# EAGLE board lada_dash_v2.2 (EAGLE 7.2.0)
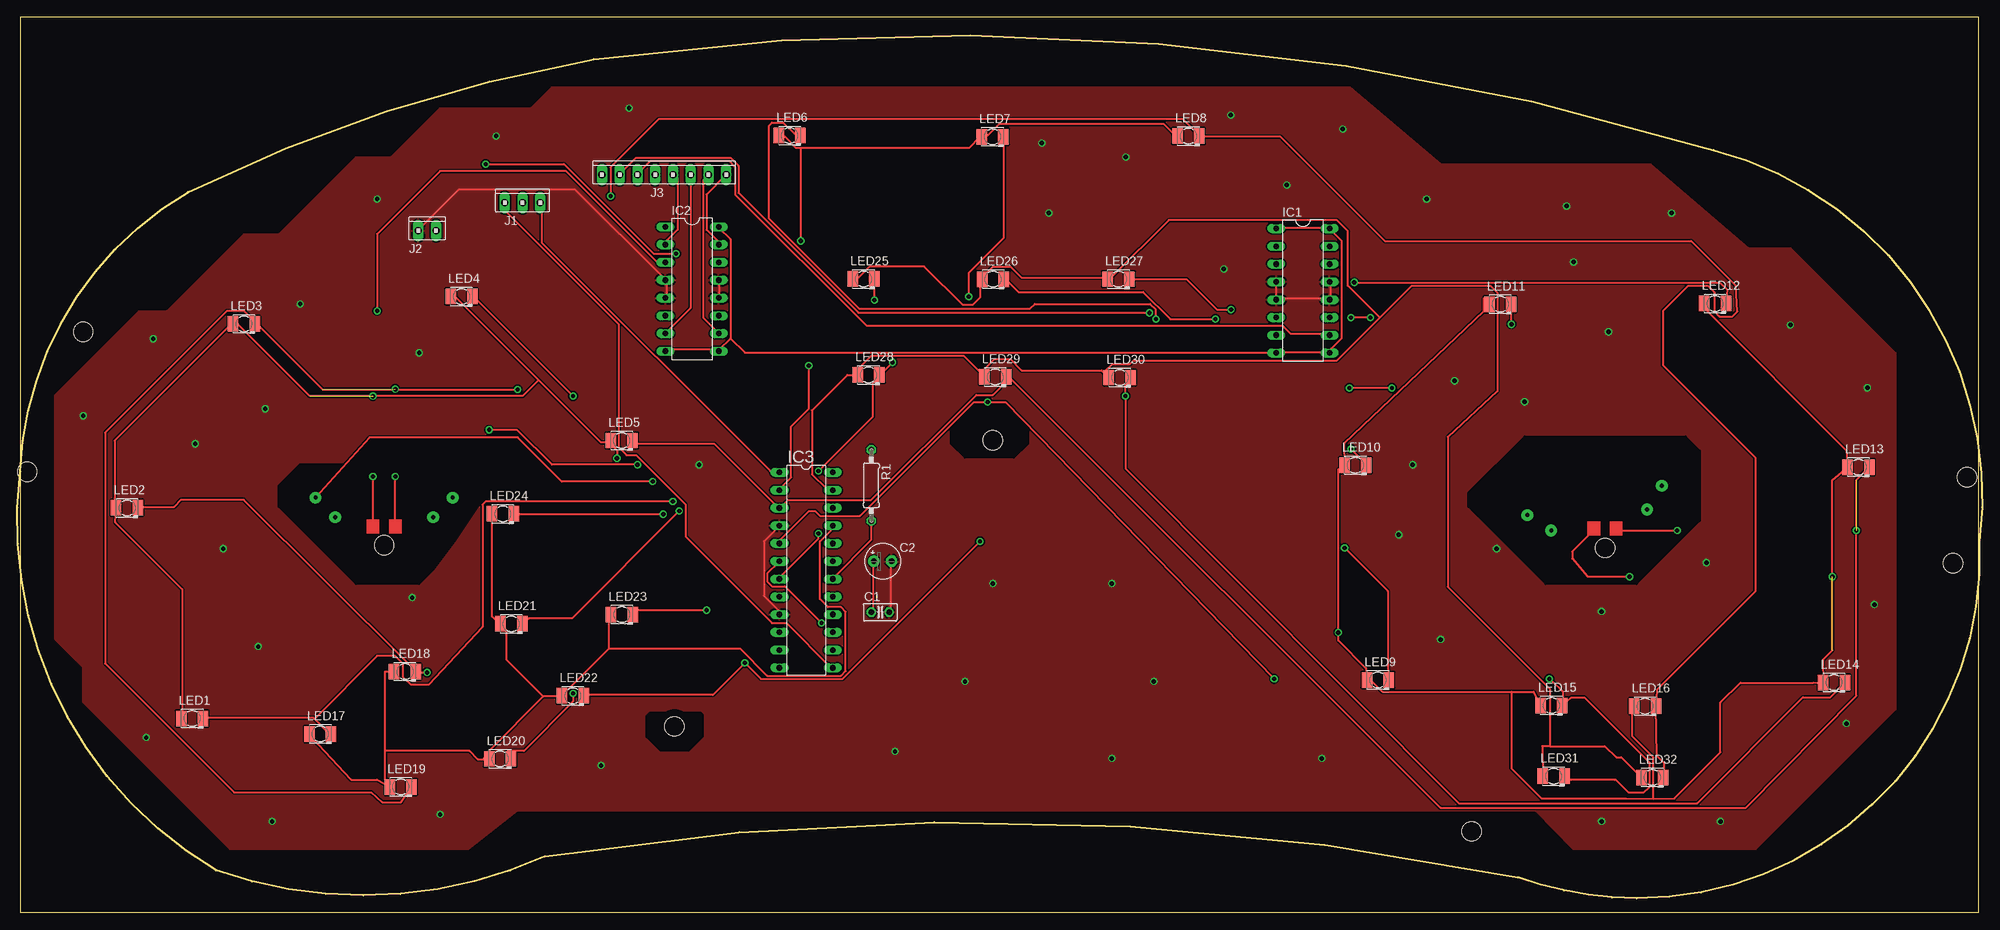
[diagram p0: board, top side]
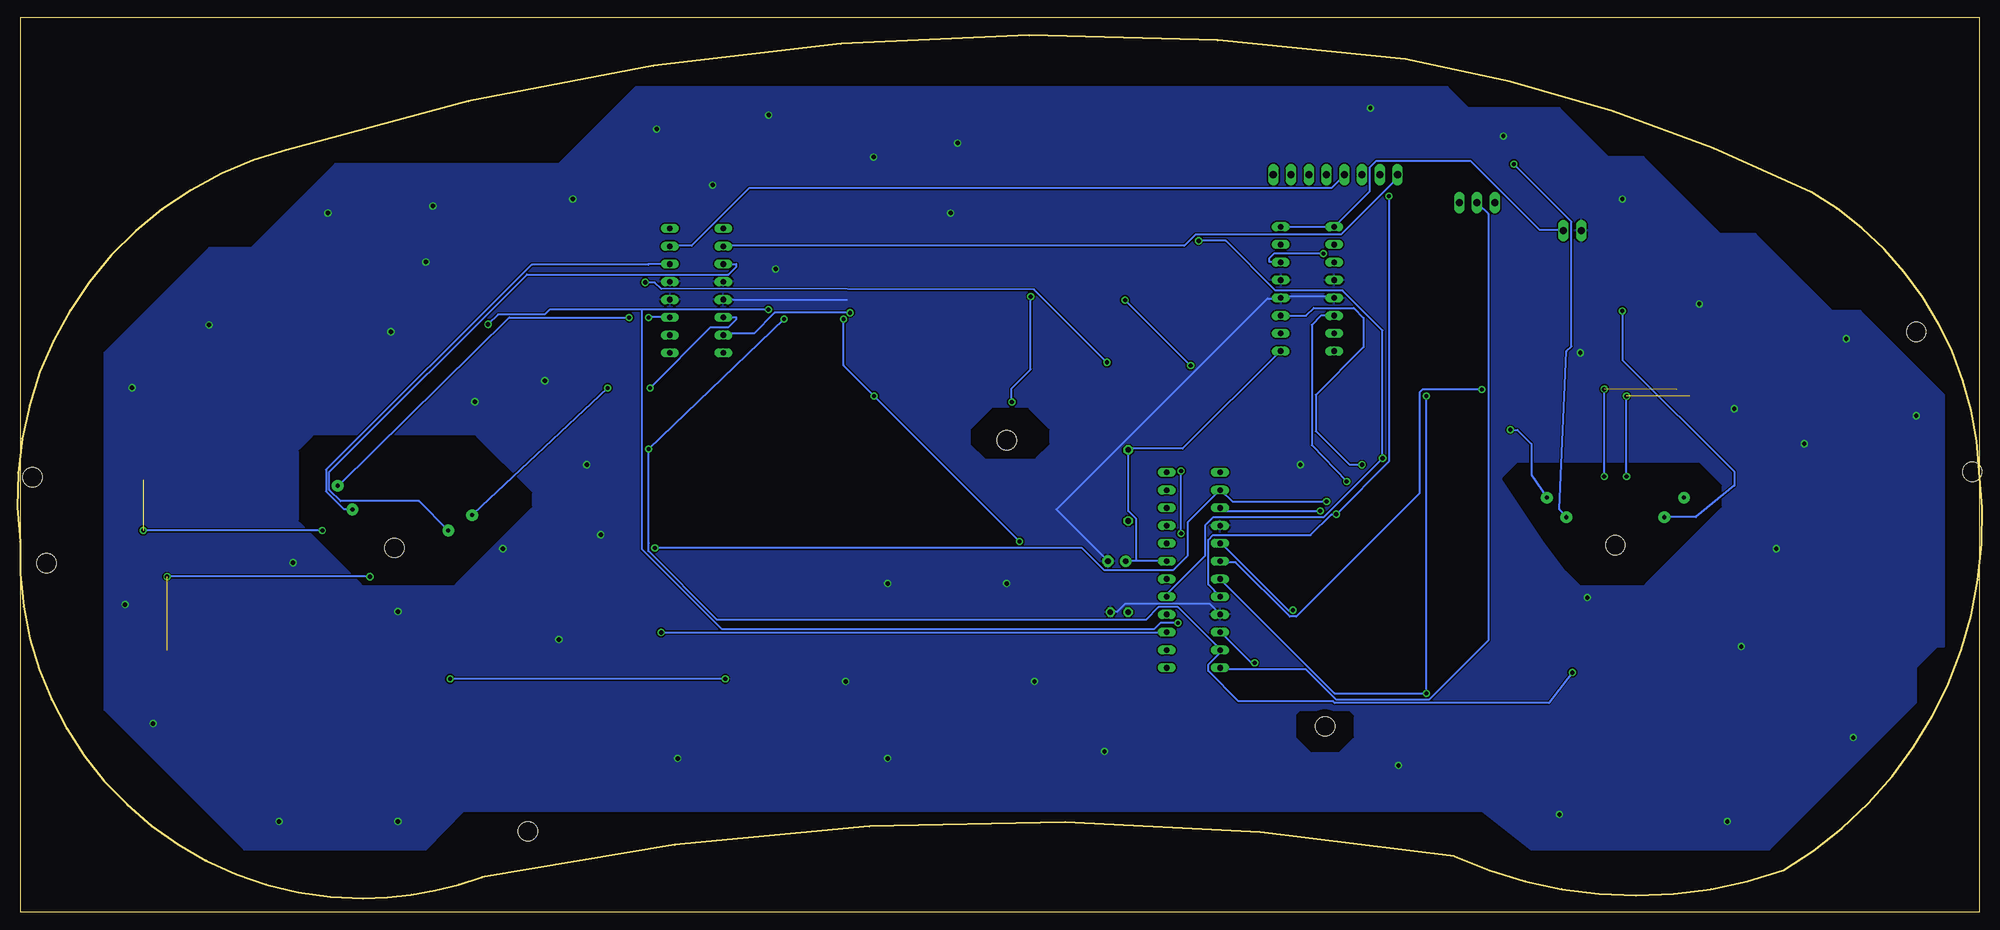
[diagram p1: board, bottom side, seen from below]

Size 280.76 x 127.94 mm. Coordinates in mm from the lower left corner, seen from the top.
Outline: 0.4,63 0.4,127.94 280.32,127.94 280.32,0 0.4,0 0.4,63
Outline: 0.4,63 arc-57 24.4,103 arc-16 82.4,122 arc-25 242.4,109 arc-82 280.4,53 arc-92 231.4,2 arc-18 214.4,5 arc21 75.4,8 arc-43 28.4,6 arc-66 0.4,63
Copper layers (1*16): Top 0.035mm / dielectric 1.5mm / Bottom 0.035mm
Design rules "default *": minimum track width 10mil, minimum drill 23mil, track to track 8mil, track to pad 8mil, pad to pad 8mil, via to via 8mil, smd to smd 0mil, copper to edge 40mil, drill to drill 6mil, minimum pad ring 10mil, minimum via ring 8mil, stop-mask expansion 4mil, vias tented up to drill 4mil, thermal gap 10mil
Holes 2.8 mm at 1.4,63 9.4,83 93.9,26.6 139.4,67.5 207.8,11.6 278.6,62.2 276.6,49.9 52.4,52.5 226.9,52.1

## Footprints (pad centres in the part's own frame; a part is rotated, then mirrored left to right if it is on the bottom)
C025-025X050 = drill 0.813 octagon: 1 -1.27,0; 2 1.27,0
E2,5-5 = drill 0.813 pad 1.6: + -1.27,0 | drill 0.813 pad 1.6 octagon: - 1.27,0
DIL16 = drill 0.813 long: 1 -8.89,-3.81; 2 -6.35,-3.81; 3 -3.81,-3.81; 4 -1.27,-3.81; 5 1.27,-3.81; 6 3.81,-3.81; 7 6.35,-3.81; 8 8.89,-3.81; 9 8.89,3.81; 10 6.35,3.81; 11 3.81,3.81; 12 1.27,3.81; 13 -1.27,3.81; 14 -3.81,3.81; 15 -6.35,3.81; 16 -8.89,3.81
DIL24-3 = drill 0.813 long: 1 -13.97,-3.81; 2 -11.43,-3.81; 3 -8.89,-3.81; 4 -6.35,-3.81; 5 -3.81,-3.81; 6 -1.27,-3.81; 7 1.27,-3.81; 8 3.81,-3.81; 9 6.35,-3.81; 10 8.89,-3.81; 11 11.43,-3.81; 12 13.97,-3.81; 13 13.97,3.81; 14 11.43,3.81; 15 8.89,3.81; 16 6.35,3.81; 17 3.81,3.81; 18 1.27,3.81; 19 -1.27,3.81; 20 -3.81,3.81; 21 -6.35,3.81; 22 -8.89,3.81; 23 -11.43,3.81; 24 -13.97,3.81
10X03MTA = drill 1.016 long: 1 2.54,0; 2 0,0; 3 -2.54,0
10X02MTA = drill 1.016 long: 1 1.27,0; 2 -1.27,0
10X08MTA = drill 1.016 long: 1 8.89,0; 2 6.35,0; 3 3.81,0; 4 1.27,0; 5 -1.27,0; 6 -3.81,0; 7 -6.35,0; 8 -8.89,0
KA-3528ASYC = smd 1.5 x 2.2: A -1.55,0; C 1.55,0
0207/10 = drill 0.813 octagon: 1 -5.08,0; 2 5.08,0

## Placement (x,y rotation side)
C1  [C025-025X050]  123.31,42.93 0 top
C2  [E2,5-5]  123.66,50.2 0 top
IC1  L293D  [DIL16]  183.71,88.88 270 top
IC2  L293D  [DIL16]  96.41,89.13 270 top
IC3  MAX7219CNG  [DIL24-3]  112.71,48.94 270 top
J1  [10X03MTA]  72.17,101.47 0 top
J2  [10X02MTA]  58.55,97.47 0 top
J3  [10X08MTA]  92.41,105.47 0 top
LED1  LY_T679-D2E2-1  [KA-3528ASYC]  24.96,27.72 0 top
LED2  LY_T679-D2E2-1  [KA-3528ASYC]  15.66,57.83 0 top
LED3  LY_T679-D2E2-1  [KA-3528ASYC]  32.36,84.14 0 top
LED4  LY_T679-D2E2-1  [KA-3528ASYC]  63.46,88.05 0 top
LED5  LY_T679-D2E2-1  [KA-3528ASYC]  86.36,67.46 0 top
LED6  LY_T679-D2E2-1  [KA-3528ASYC]  110.36,111.07 0 top
LED7  LY_T679-D2E2-1  [KA-3528ASYC]  139.36,110.88 0 top
LED8  LY_T679-D2E2-1  [KA-3528ASYC]  167.36,110.99 0 top
LED9  LY_T679-D2E2-1  [KA-3528ASYC]  194.42,33.22 0 top
LED10  LY_T679-D2E2-1  [KA-3528ASYC]  191.22,63.93 0 top
LED11  LY_T679-D2E2-1  [KA-3528ASYC]  211.92,86.94 0 top
LED12  LY_T679-D2E2-1  [KA-3528ASYC]  242.62,87.05 0 top
LED13  LY_T679-D2E2-1  [KA-3528ASYC]  263.12,63.66 0 top
LED14  LY_T679-D2E2-1  [KA-3528ASYC]  259.62,32.87 0 top
LED15  LY_T679-D2E2-1  [KA-3528ASYC]  219.22,29.58 0 top
LED16  LY_T679-D2E2-1  [KA-3528ASYC]  232.62,29.49 0 top
LED17  LY_T679-D2E2-1  [KA-3528ASYC]  43.28,25.52 0 top
LED18  LY_T679-D2E2-1  [KA-3528ASYC]  55.38,34.43 0 top
LED19  LY_T679-D2E2-1  [KA-3528ASYC]  54.78,17.94 0 top
LED20  LY_T679-D2E2-1  [KA-3528ASYC]  68.98,21.95 0 top
LED21  LY_T679-D2E2-1  [KA-3528ASYC]  70.58,41.26 0 top
LED22  LY_T679-D2E2-1  [KA-3528ASYC]  79.38,30.97 0 top
LED23  LY_T679-D2E2-1  [KA-3528ASYC]  86.38,42.58 0 top
LED24  LY_T679-D2E2-1  [KA-3528ASYC]  69.38,56.99 0 top
LED25  LY_T679-D2E2-1  [KA-3528ASYC]  120.92,90.56 0 top
LED26  LY_T679-D2E2-1  [KA-3528ASYC]  139.44,90.53 0 top
LED27  LY_T679-D2E2-1  [KA-3528ASYC]  157.34,90.54 0 top
LED28  LY_T679-D2E2-1  [KA-3528ASYC]  121.64,76.85 0 top
LED29  LY_T679-D2E2-1  [KA-3528ASYC]  139.74,76.56 0 top
LED30  LY_T679-D2E2-1  [KA-3528ASYC]  157.54,76.47 0 top
LED31  LY_T679-D2E2-1  [KA-3528ASYC]  219.54,19.48 0 top
LED32  LY_T679-D2E2-1  [KA-3528ASYC]  233.64,19.29 0 top
R1  11K  [0207/10]  122.03,61.05 270 top

## Library data of the parts
C1 R1 = resistor
C2 = rcl
IC1 IC2 = st-microelectronics; MPN: L293D; OC_FARNELL: 9589619; OC_NEWARK: 56P8249
IC3 = maxim; MF: MAXIM; MPN: MAX7219CNG; OC_FARNELL: 1523914; OC_NEWARK: 34C4018
J1-J3 = con-amp
LED1-LED32 = led; COLOR: yellow

## Nets
+5V: C1.1 C2.+ IC1.1 IC1.8 IC1.9 IC1.16 IC2.1 IC2.8 IC2.9 IC2.16 IC3.19 J2.1 R1.1
GND: C1.2 C2.- IC1.4 IC1.5 IC1.12 IC1.13 IC2.4 IC2.5 IC2.12 IC2.13 IC3.4 IC3.9 J2.2
N$1: IC3.17 LED1.A LED2.A LED3.A LED4.A LED5.A LED6.A LED7.A LED8.A
N$2: IC3.15 LED9.A LED10.A LED11.A LED12.A LED13.A LED14.A LED15.A LED16.A
N$3: IC3.21 LED17.A LED18.A LED19.A LED20.A LED21.A LED22.A LED23.A LED24.A
N$4: IC3.23 LED25.A LED26.A LED27.A LED28.A LED29.A LED30.A LED31.A LED32.A
N$5: IC3.2 LED1.C LED9.C LED17.C LED25.C
N$6: IC3.11 LED2.C LED10.C LED18.C LED26.C
N$7: IC3.6 LED3.C LED11.C LED19.C LED27.C
N$8: IC3.7 LED4.C LED12.C LED20.C LED28.C
N$9: IC3.3 LED5.C LED13.C LED21.C LED29.C
N$10: IC3.10 LED6.C LED14.C LED22.C LED30.C
N$11: IC3.5 LED7.C LED15.C LED23.C LED31.C
N$12: IC3.8 LED8.C LED16.C LED24.C LED32.C
N$13: IC3.13 J1.3
N$14: IC3.12 J1.2
N$17: IC3.1 J1.1
N$24: IC1.2 J3.8
N$25: IC1.7 J3.7
N$26: IC1.10 J3.6
N$27: IC1.15 J3.5
N$28: IC2.2 J3.4
N$29: IC2.7 J3.3
N$30: IC2.10 J3.2
N$31: IC2.15 J3.1
N$35: IC3.18 R1.2

## Tracks (layer width: path | path; a pad name or v marks a point on that pad's centre or on a via)
+5V
  Top 0.254: C1.1 122.24,42.98 122.24,50.06 C2.+ | IC1.1 180.08,97.84 187.39,97.84 IC1.16 187.62,97.61 189.22,96.01 189.22,82.07 187.62,80.47 187.62,80.01 IC1.9 187.39,80.01 180.08,80.01 IC1.8 179.85,80.01 103.95,80.01 101.89,82.07 | IC2.8 92.75,80.47 100.07,80.47 IC2.9 100.29,80.47 101.89,82.07 | 101.89,82.07 101.89,96.24 100.29,97.84 IC2.16
  Bottom 0.254: 120.87,50.29 122.24,50.29 C2.+ | 120.87,50.29 116.53,50.29 IC3.19 | 120.87,50.29 120.87,56.24 122.01,57.38 122.01,66.06 R1.1 122.01,66.29 114.24,66.29 100.29,80.24 IC2.9 | IC2.16 100.07,98.07 92.75,98.07 IC2.1 92.52,98.07 87.49,103.1 87.49,106.53 86.58,107.44 73.09,107.44 63.26,97.61 59.83,97.61 J2.1
GND  (via drill 0.6)
  Top 0.254: IC2.12 100.29,88.01 100.29,90.3 IC2.13 | IC2.5 92.75,88.01 92.75,90.3 IC2.4 92.52,90.53 79.72,103.33 63.03,103.33 57.32,97.61 J2.2 | IC1.4 179.85,90.07 179.85,87.78 IC1.5 180.08,87.78 187.39,87.78 IC1.12 187.62,87.78 187.62,90.07 IC1.13 | C1.2 124.75,42.98 124.75,50.06 C2.- | IC3.9 108.75,42.75 108.75,43.2 106.7,45.26 106.7,53.03 108.75,55.09 IC3.4
  Bottom 0.254: IC2.5 92.75,88.01 100.07,88.01 IC2.12 100.29,87.78 102.12,87.78 132.3,57.61 124.98,50.29 C2.- | C1.2 124.53,42.98 123.61,42.98 122.47,44.12 110.35,44.12 108.98,42.75 IC3.9 | 162.25,87.55 179.85,87.55 IC1.5
  other vias: 87.4,115 68.4,111 51.4,102 40.4,87 57.4,80 19.4,82 139.4,47 156.4,47 162.4,33 135.4,33 125.4,23 156.4,22 83.4,21 60.4,14 36.4,13 18.4,25 9.4,71 173.4,114 189.4,112 201.4,102 221.4,101 236.4,100 253.4,84 264.4,75 265.4,44 261.4,27 243.4,13 226.4,13 186.4,22 97.4,64 172.4,92 226.4,43 241.4,50 211.4,52 215.4,73 227.4,83 25.4,67 35.4,72 29.4,52 34.4,38 56.4,45 203.4,39 197.4,54 199.4,64 205.4,76 146.4,110 147.4,100 158.4,108 181.4,104 222.4,93
  pour Top: 5.4,39 5.4,74 17.4,86 21.4,86 32.4,97 37.4,97 48.4,108 53.4,108 60.4,115 73.4,115 76.4,118 190.4,118 203.4,107 233.4,107 247.4,95 253.4,95 268.4,80 268.4,29 248.4,9 222.4,9 217,14.5 71.4,14.5 64.4,9 30.4,9 9.4,30 9.4,35
  pour Bottom: 5.4,38 5.4,74 17.4,86 21.4,86 32.4,97 37.4,97 48.4,108 53.4,108 60.4,115 73.4,115 76.4,118 192.4,118 203.4,107 235.4,107 247.4,95 253.4,95 268.4,80 268.4,29 248.4,9 222.4,9 217,14.5 71.4,14.5 64.4,9 30.4,9 9.4,30 9.4,35 6.4,38
N$1  (via drill 0.6, 0.61)  (1 unrouted)
  Top 0.254: LED1.A 23.57,29.03 23.57,46.19 13.98,55.78 LED2.A 13.88,59.21 13.88,67.44 30.57,84.12 LED3.A 30.8,84.12 31.49,84.12 41.77,73.84 72.18,73.84 74.46,76.12 | LED8.A 165.45,111.1 163.85,112.7 140.3,112.7 138.7,111.1 137.79,111.1 LED7.A 137.56,110.87 135.96,109.27 111.95,109.27 | 111.95,109.27 111.27,109.27 109.67,110.87 108.75,110.87 LED6.A | 74.46,76.12 83.38,67.21 84.52,67.21 LED5.A 84.75,66.98 85.66,66.06 v85.66,64.92 | 74.46,76.12 62.58,88.01 61.89,88.01 LED4.A | v111.95,96.01 111.95,109.27 | 50.8,55 v50.8,62.3
  Bottom 0.254: IC3.17 116.3,45.26 116.3,45.72 111.04,50.98 111.04,55.32 109.9,56.46 94.12,56.46 v85.66,64.92 85.66,83.21 91.38,88.92 100.98,88.92 108.07,96.01 v111.95,96.01 | v50.8,62.3 v50.8,73.8
N$2  (via drill 0.6, 0.61)  (1 unrouted)
  Top 0.254: LED12.A 240.9,87.1 240.9,86.6 261.4,66.06 LED13.A 259.4,61.84 259.4,37.49 257.99,36.08 LED14.A 256.66,32.85 246.24,32.85 243.4,30 243.4,22.9 236.8,16.3 236.78,16.3 233.83,16.25 | 213.51,31.55 195.08,31.55 192.65,33.98 LED9.A 192.72,34.9 188.76,38.86 v188.76,40.01 188.76,63.32 LED10.A 189.56,67.05 209.57,85.95 209.57,87.78 LED11.A | 213.51,31.55 216.65,31.55 LED15.A | 233.83,16.25 233.83,22.15 230.83,25.15 230.83,29.32 LED16.A | 233.83,16.25 229.87,16.29 217.79,16.29 213.51,20.57 213.51,31.55 | 225.3,54.7 222.2,51.6 222.2,50.6 224.4,48 v230.4,48
  Bottom 0.254: v188.76,40.01 116.53,40.01 IC3.15 | v230.4,48 v259.4,48
N$3
  Top 0.254: LED17.A 42.06,25.03 47.72,18.97 51.37,18.97 LED19.A 52.6,17.97 52.52,19.89 52.52,23.09 | 52.52,23.09 52.52,34.45 LED18.A | 75.15,30.86 67.38,23.09 66.69,22.09 LED20.A 67.23,21.9 65.8,21.9 64.61,23.09 52.52,23.09 | 75.15,30.86 77.66,30.86 LED22.A 77.89,31.09 84.52,37.72 | 75.15,30.86 69.89,36.12 69.89,40.33 LED21.A 68.86,41.26 67.83,42.29 67.83,56.92 LED24.A | 84.52,37.72 84.52,42.98 LED23.A | 84.52,37.72 103.27,37.72 107.15,33.83 117.67,33.83 118.35,34.52 118.35,42.98 117.67,43.66 115.84,43.66 114.7,44.81 114.7,53.03 116.3,54.63 116.3,55.09 IC3.21
N$4
  Top 0.254: LED25.A 119.27,90.53 119.95,90.53 121.78,92.35 129.57,92.35 135.1,86.83 136.51,86.83 137.56,87.87 137.56,90.53 LED26.A 137.79,90.75 139.39,92.35 141.9,92.35 143.5,90.75 155.16,90.75 LED27.A 155.39,90.75 156.3,90.75 164.53,98.98 188.53,98.98 190.13,97.38 190.13,89.61 194.71,85.04 | 218.98,23.77 226.84,23.77 228.54,22.17 229.2,22.17 LED32.A | 217.88,20.17 LED31.A 217.93,23.77 218.98,23.77 | IC3.23 116.3,60.58 115.61,60.58 113.55,62.64 113.55,71.78 118.61,76.84 LED28.A 119.94,77.27 119.73,77.27 122.01,79.55 135.27,79.55 137.56,77.27 LED29.A 137.79,77.27 139.61,79.1 141.9,79.1 143.5,77.5 154.93,77.5 LED30.A 155.36,77.3 156.46,78.4 158.97,78.4 159.5,78.87 188.53,78.87 194.71,85.04 | 218.98,23.77 218.98,31.96 204.4,46.55 204.4,68 211.51,74.51 211.51,88.58 210.48,89.61 199.28,89.61 194.71,85.04
N$5  (via drill 0.61)
  Top 0.254: 42.46,27.66 44.06,26.06 LED17.C | 42.46,27.66 42.32,27.8 26.23,27.8 LED1.C | v122.47,87.55 122.47,90.3 LED25.C | v113.1,78.18 113.1,72.01 110.58,69.49 110.58,62.18 108.98,60.58 IC3.2 | v189.68,52.12 195.85,45.95 195.85,35.2 LED9.C | 42.46,27.66 51.37,36.68 53.96,36.68 55.1,35.53 55.1,33.6 56.26,32.55 58.78,32.55 66.46,40.83 66.46,58.29 66.92,58.75 v93.67,58.75
  Bottom 0.254: v113.1,78.18 v122.47,87.55 | v189.68,52.12 128.64,52.12 125.44,48.92 115.61,48.92 113.55,50.98 113.55,55.78 108.98,60.35 IC3.2 108.75,60.35 107.15,58.75 v93.67,58.75
N$6  (via drill 0.61)
  Top 0.254: v190.56,66.25 192.86,63.95 LED10.C | v171.2,84.81 164.76,84.81 160.87,88.7 143.04,88.7 141.21,90.53 LED26.C | LED2.C 17.08,57.98 22.38,57.98 23.4,59 32.32,59 32.34,58.98 55.95,35.48 LED18.C 57.17,33.75 56.63,34.29 v58.55,34.29
  Bottom 0.254: v171.2,84.81 v190.56,66.25 190.56,52.81 190.59,52.58 190.59,51.66 180.76,41.83 119.5,41.83 117.67,43.66 114.93,43.66 108.98,37.72 IC3.11 108.98,37.49 108.98,37.03 110.58,35.43 110.58,34.52 106.24,30.18 92.75,30.18 92.52,29.95 61.89,29.95 v58.55,34.29
N$7  (via drill 0.6, 0.61)  (1 unrouted)
  Top 0.254: v213.52,84.08 213.52,87.01 213.19,86.88 LED11.C | v173.45,86.18 171.39,86.18 167.05,90.53 158.82,90.53 LED27.C | LED19.C 54.8,15.74 52.12,15.74 50.52,17.14 30.94,17.14 12.51,35.58 12.51,68.58 29.89,85.95 32.4,85.95 34,84.35 LED3.C 34.23,84.12 43.6,74.75 v71.49,74.75 | v114.93,41.38 109.67,46.63 107.84,46.63 107.15,47.32 107.15,48.46 108.75,50.06 IC3.6 | 53.9,55 54,55 v54,62.3
  Bottom 0.254: v173.45,86.18 191.51,86.18 | v71.49,74.75 79.95,74.75 80.41,74.3 80.41,59.89 98.01,42.29 98.92,42.29 106.7,50.06 108.75,50.06 IC3.6 | 191.51,86.18 191.51,51.89 180.08,40.46 118.35,40.46 117.44,41.38 v114.93,41.38 | v54,62.3 v54,74.8 | 191.51,86.18 204.71,86.18 205.4,85.5 212.11,85.5 v213.52,84.08
N$8  (via drill 0.61)
  Top 0.254: v79.39,31.32 79.39,30.18 72.41,23.09 70.12,23.09 LED20.C | v114.47,63.09 122.24,70.87 122.24,75.84 LED28.C 123.47,77.04 v125.07,78.64 | v114.47,54.18 114.47,53.49 108.75,47.78 IC3.7 | v191.05,90.07 243.28,90.07 244.34,89.01 LED12.C | v79.39,73.84 65.32,87.91 LED4.C
  Bottom 0.254: IC3.7 108.75,47.55 92.52,31.32 v79.39,31.32 v79.39,73.84 | v114.47,54.18 v114.47,63.09 | v191.05,90.07 189.68,90.07 188.76,89.15 135.48,89.05 v125.07,78.64
N$9  (via drill 0.6, 0.61)  (1 unrouted)
  Top 0.254: v94.58,57.38 79.26,42.06 73.09,42.06 LED21.C | LED5.C 88.18,66.98 99.61,66.98 108.75,57.84 IC3.3 108.98,57.84 110.12,58.98 122.01,58.98 137.03,74 139.4,74 141.44,76.04 LED29.C | 140.99,77.04 LED29.C | LED13.C 262.83,61.84 262.83,30.98 247.03,14.97 203.38,14.97 141.21,77.04 LED29.C | 228.5,54.6 v237.2,54.6
  Bottom 0.254: v94.58,57.38 108.52,57.38 108.75,57.61 IC3.3 | v237.2,54.6 v262.8,54.6
N$10  (via drill 0.61)
  Top 0.254: LED22.C 81.09,31.09 99.38,31.09 v103.95,35.66 106.24,33.38 117.9,33.38 v137.56,53.03 | LED30.C 158.36,75.27 v158.36,73.84 158.36,63.45 205.98,15.63 240.06,15.63 255.17,30.75 259.09,30.75 LED14.C | v162.7,84.81 162.7,86.18 161.88,87 145.4,87 144.7,86.3 120.3,86.3 107.38,99.21 107.38,112.47 107.84,112.93 109.44,112.93 111.27,111.1 111.95,111.1 LED6.C
  Bottom 0.254: v103.95,35.66 104.41,35.66 108.75,40.01 IC3.10 | v137.56,53.03 v158.36,73.84 162.7,78.18 v162.7,84.81
N$11  (via drill 0.61)
  Top 0.254: 228.28,18.95 222.01,18.95 LED31.C | 228.28,18.95 | v98.47,43.2 88.18,43.2 LED23.C | v135.96,88.04 135.96,91.44 140.99,96.47 140.99,110.87 LED7.C | IC3.5 108.98,52.81 108.98,53.26 113.1,57.38 114.01,57.38 114.7,56.69 120.41,56.69 136.67,72.95 v138.66,72.95 141.23,72.95 v179.6,33.38 | v218.94,33.38 220.48,31.93 220.88,31.55 LED15.C 222.11,30.72 223.97,30.72 233.2,21.49 233.2,17.9 232.4,17.1 230.3,17.1 228.45,18.95 228.28,18.95
  Bottom 0.254: v98.47,43.2 99.15,43.2 108.75,52.81 IC3.5 | v179.6,33.38 v218.94,33.38 | v138.66,72.95 138.7,72.99 138.7,74.9 135.96,77.64 v135.96,88.04
N$12  (via drill 0.61)
  Top 0.254: v92.29,56.92 71.26,56.92 LED24.C | LED32.C 235.33,21.37 234.32,22.38 LED16.C | 234.03,29.32 LED16.C | LED16.C 234.33,31.85 248.4,45.92 248.4,65 235.17,78.23 235.17,85.95 238.83,89.61 241.56,89.61 242.48,88.68 242.48,85.95 243.26,85.18 245.08,85.18 245.81,85.91 245.61,89.58 239.2,96 195.4,96 180.53,110.87 169.1,110.87 LED8.C 168.87,111.1 166.59,113.39 91.61,113.39 84.75,106.53 v84.75,102.41
  Bottom 0.254: IC3.8 108.98,45.26 110.58,46.86 110.58,53.26 109.9,53.95 95.95,53.95 92.98,56.92 v92.29,56.92 84.75,64.47 v84.75,102.41
N$13
  Top 0.254: IC3.13 116.3,34.98 109.9,41.38 107.84,41.38 95.49,53.72 95.49,58.29 88.41,65.38 87.04,65.38 85.89,66.52 85.89,84.12 69.66,100.36 69.66,101.27 J1.3
N$14
  Bottom 0.254: IC3.12 108.75,34.75 96.64,34.75 92.29,30.4 79.03,30.4 70.58,38.86 70.58,99.9 71.95,101.27 J1.2
N$17
  Top 0.254: IC3.1 108.75,63.09 107.61,63.09 74.92,95.78 74.92,101.27 J1.1
N$24
  Bottom 0.254: IC1.2 179.85,95.33 114.01,95.33 112.41,96.93 91.61,96.93 83.61,104.93 83.61,105.39 J3.8
N$25  (via drill 0.61)
  Top 0.254: v161.79,85.72 120.18,85.72 103.04,102.87 103.04,106.76 101.89,107.9 88.41,107.9 86.12,105.61 J3.7
  Bottom 0.254: v161.79,85.72 172.53,85.72 175.5,82.75 179.85,82.75 IC1.7
N$26
  Top 0.254: IC1.10 187.39,82.75 181.9,82.75 180.76,83.9 121.33,83.9 102.58,102.64 102.58,106.53 101.67,107.44 90.46,107.44 88.64,105.61 J3.6
N$27
  Bottom 0.254: IC1.15 187.39,95.33 184.42,95.33 176.19,103.56 92.98,103.56 91.15,105.39 J3.5
N$28
  Top 0.254: IC2.2 92.75,95.56 92.75,96.01 94.35,97.61 94.35,104.93 93.89,105.39 J3.4
N$29
  Top 0.254: IC2.7 92.75,82.98 96.18,86.41 96.18,105.39 J3.3
N$30
  Top 0.254: IC2.10 100.07,82.98 98.01,85.04 98.01,104.7 98.69,105.39 J3.2
N$31
  Top 0.254: IC2.15 100.07,95.56 100.07,96.01 98.47,97.61 98.47,102.64 101.21,105.39 J3.1
N$35
  Top 0.254: IC3.18 116.53,47.78 122.01,53.26 122.01,55.78 R1.2
S$1
  cutout Bottom: 207.4,60 215.4,68 238.4,68 240.4,66 240.4,56 231.4,47 218.4,47 207.4,58
S$2
  cutout Top: 215.4,68 238.4,68 240.4,66 240.4,56 231.4,47 218.4,47 207.4,58 207.4,60
S$3
  cutout Top: 68.4,62 62.4,53 59.4,49 57.4,47 48.4,47 37.4,58 37.4,61 40.4,64 66.4,64
S$4
  cutout Bottom: 68.4,62 62.4,53 59.4,49 57.4,47 48.4,47 37.4,58 37.4,61 40.4,64 66.4,64
S$5
  cutout Bottom: 135.4,65 133.4,67 133.4,69 136.4,72 141.4,72 144.4,69 144.4,67 142.4,65
S$6
  cutout Top: 133.4,69 136.4,72 141.4,72 144.4,69 144.4,67 142.4,65 135.4,65 133.4,67
S$7
  cutout Top: 89.9,28.1 90.4,28.6 97.6,28.6 97.9,28.3 97.9,25.1 95.9,23.1 91.9,23.1 89.9,25.1
S$8
  cutout Bottom: 97.5,28.6 97.9,28.2 97.9,25.1 95.9,23.1 91.9,23.1 89.9,25.1 89.9,28.1 90.4,28.6
STEP1A  (via drill 0.6, 0.6 pad 1.68)
  Top 0.254: 92.6,93 91.4,93 78.4,106 60.4,106 51.4,97 v51.4,86
  Bottom 0.254: v51.4,86 51.4,79 35.4,63 35.4,61 40.9,56.5 v45.4,56.5
STEP1B  (via drill 0.6, 0.6 pad 1.68)
  Top 0.254: v90.8,61.6 77.8,61.6 71.5,67.9 50.3,67.9 v42.6,59.3
  Bottom 0.254: 92.6,85.3 94.5,85.3 95.8,84 95.8,66.8 v90.8,61.6
STEP1C  (via drill 0.6, 0.6 pad 1.68)
  Top 0.254: v88.6,64 76.4,64 71.4,69 v67.4,69
  Bottom 0.254: 100.2,85.3 96.6,85.3 95.5,86.4 89.8,86.4 88.4,85 88.4,80.8 95.2,74 95.2,68.8 90.4,64 v88.6,64 | v67.4,69 66.4,69 64.4,67 64.4,62.5 v62.2,59.3
STEP1D  (via drill 0.58, 0.6 pad 1.68)
  Top 0.254: v94.12,94.18 90.92,94.18 78.12,106.98 v66.92,106.98
  Bottom 0.254: 100.3,93 101.89,93 101.89,93.5 101.21,94.18 v94.12,94.18 | v66.92,106.98 58.69,98.75 58.69,80.92 59.38,80.24 60.38,57.61 59.46,56.69 v59.4,56.5
STEP2A  (via drill 0.6 pad 1.68)
  Bottom 0.254: 179.9,92.7 178.02,92.7 178.02,92.35 179.16,91.21 207.97,91.21 236.2,62.98 236.2,60.41 234.6,58.81 223.4,58.81 219.28,54.69 v219.2,54.6
STEP2B  (via drill 0.58, 0.6 pad 1.68)
  Top 0.254: v196.42,74.98 v190.36,74.98
  Bottom 0.254: 179.9,85.1 178.02,85.1 178.02,84.81 179.16,83.67 181.68,83.67 v190.36,74.98 | v196.42,74.98 215.62,56.98 v215.8,56.8
STEP2C  (via drill 0.58, 0.6 pad 1.68)
  Top 0.254: v193.33,85.04 v190.59,85.04
  Bottom 0.254: 187.6,85.1 190.3,85.1 190.36,85.04 v190.59,85.04 | v193.33,85.04 210.48,85.04 234.83,61.09 v235,61
STEP2D  (via drill 0.6 pad 1.68)
  Bottom 0.254: 187.5,92.7 190.59,92.7 | 190.59,92.7 190.6,92.7 | v232.9,57.6 233,57.66 234.14,57.66 236.65,60.18 236.65,63.31 207.28,92.58 190.59,92.58 190.59,92.7
(copper drawn outside any net)
  shapes: Top area x4